# EAGLE board ManualBot (EAGLE 8.0.1)
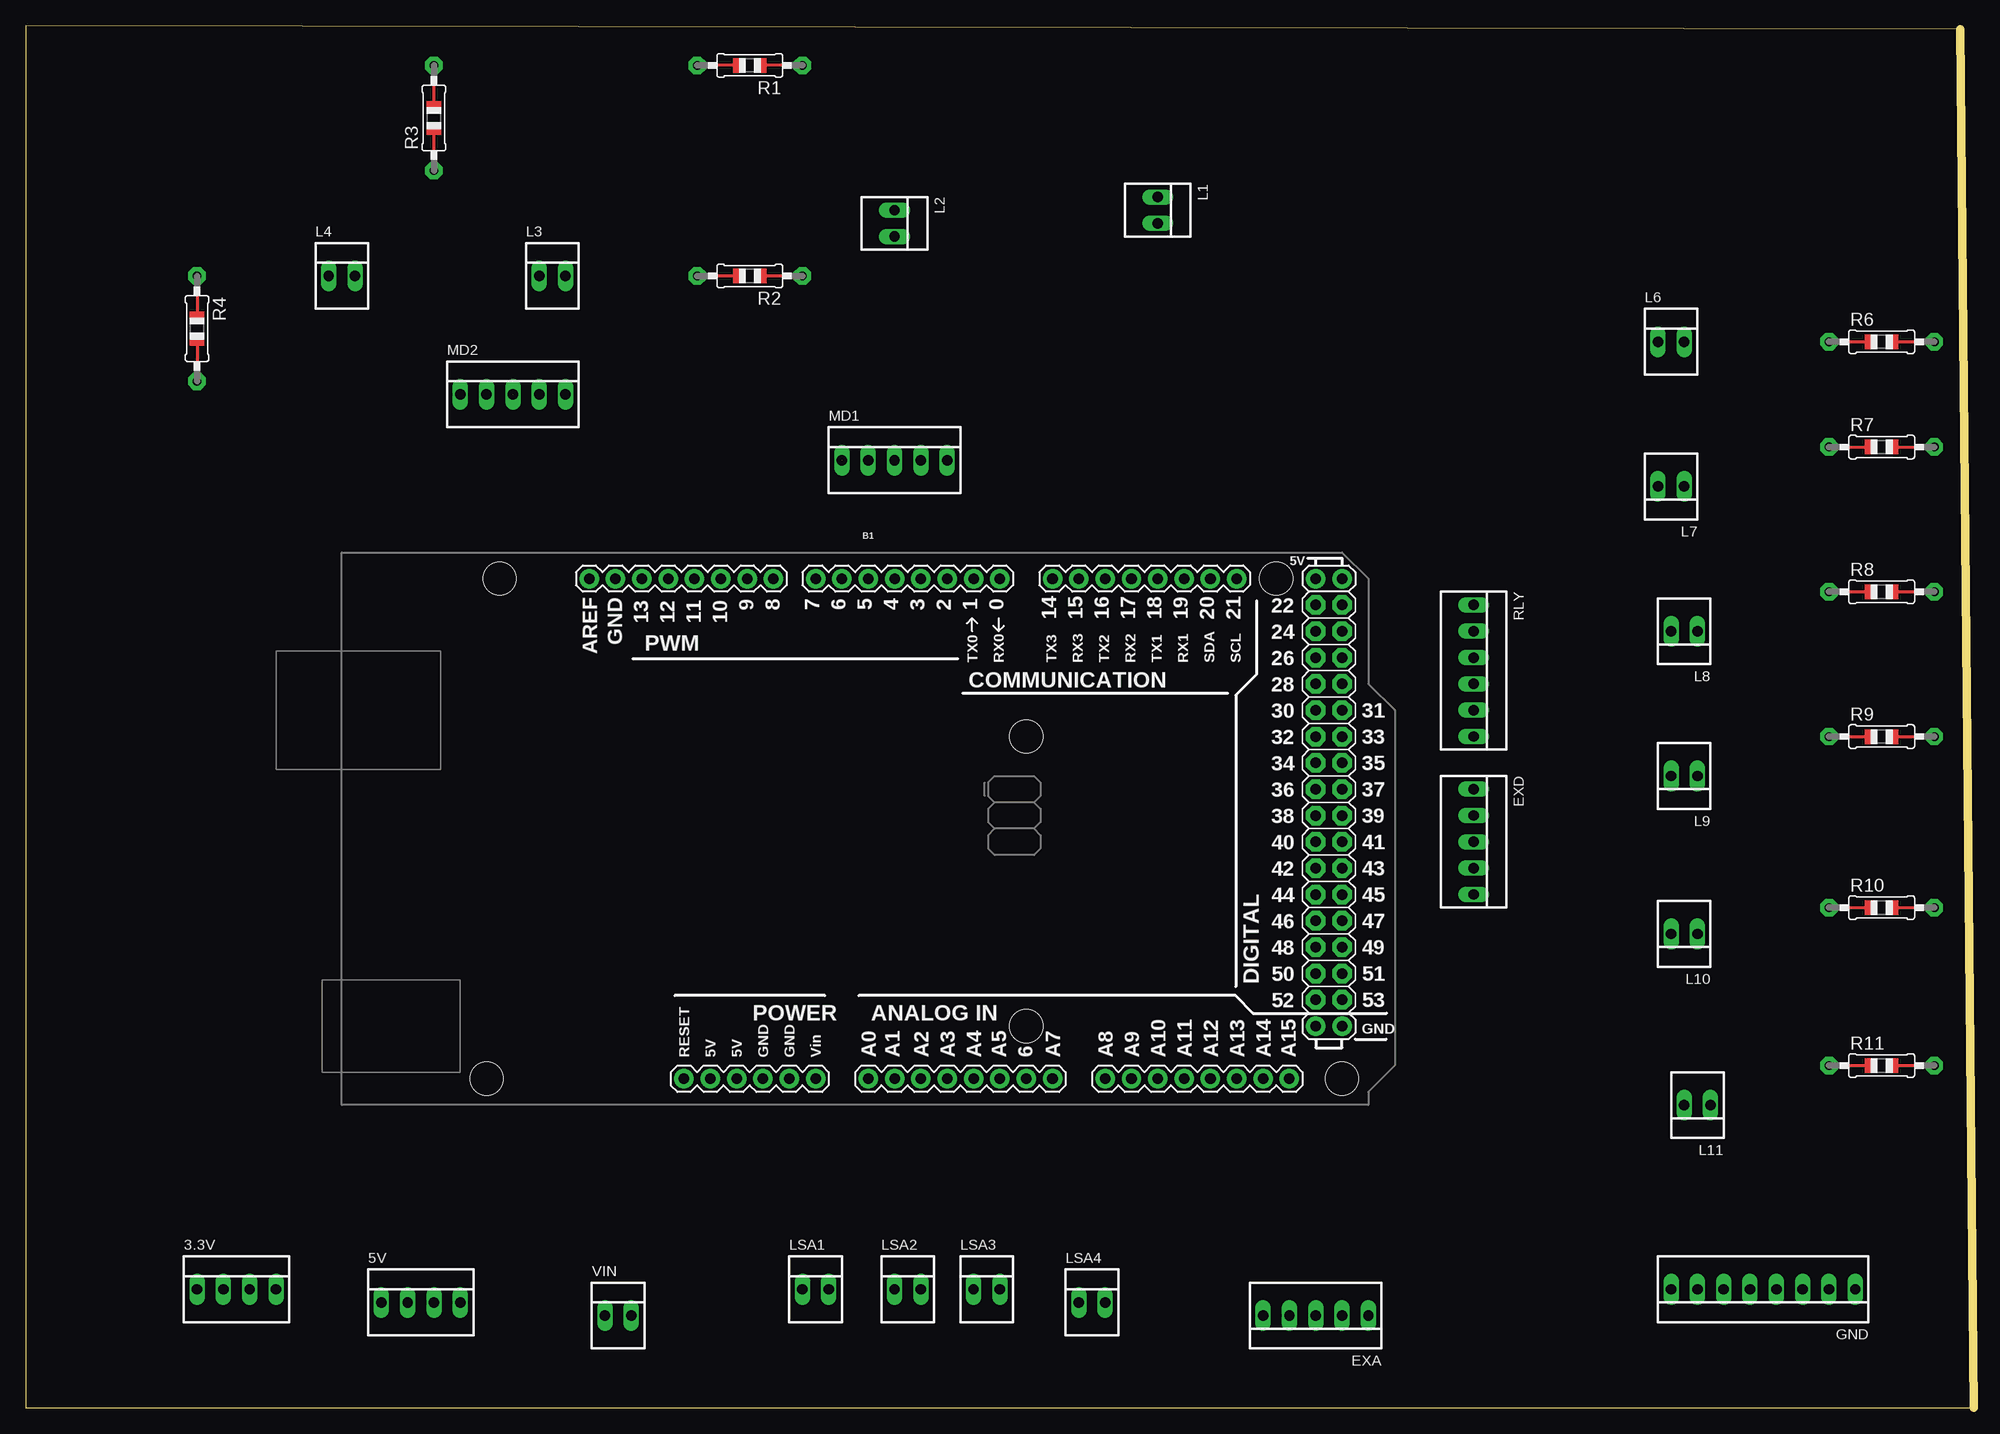
[diagram p0: board, top side]
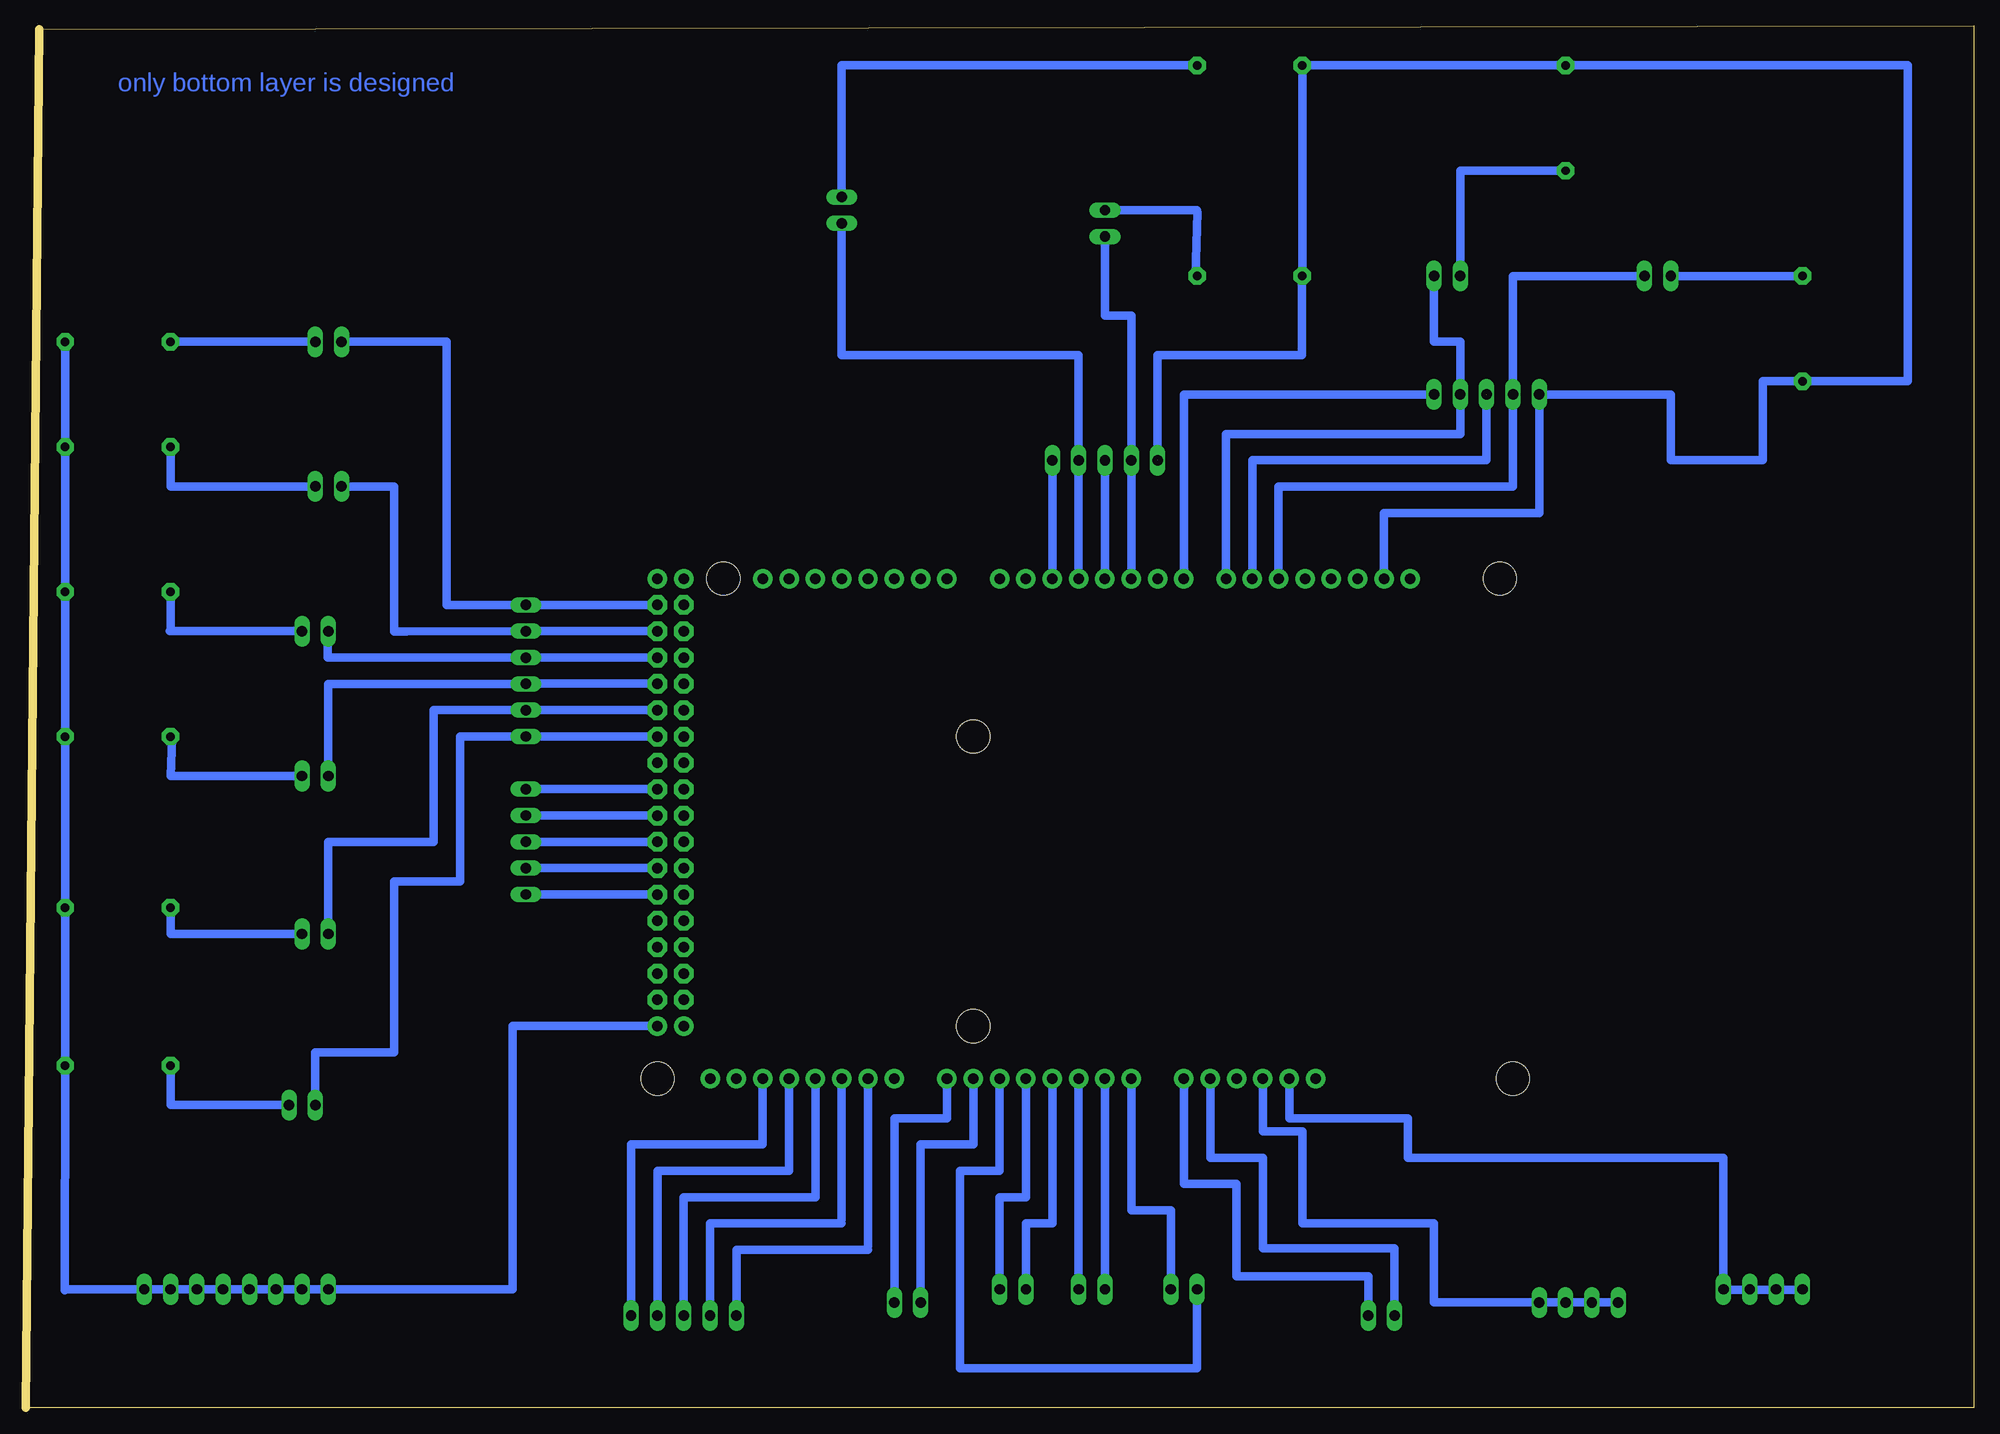
[diagram p1: board, bottom side, seen from below]

Size 187.94 x 133.35 mm. Coordinates in mm from the lower left corner, seen from the top.
Outline: 0,0 187.94,0 186.67,133.02 0,133.35 0,0
Copper layers (1*16): Top 0.035mm / dielectric 1.5mm / Bottom 0.035mm
Design rules "default": minimum track width 10mil, minimum drill 24mil, track to track 8mil, track to pad 8mil, pad to pad 8mil, via to via 8mil, smd to smd 8mil, copper to edge 40mil, drill to drill 8mil, minimum pad ring 10mil, minimum via ring 8mil, stop-mask expansion 4mil, vias tented up to drill 0mil, thermal gap 10mil

## Footprints (pad centres in the part's own frame; a part is rotated, then mirrored left to right if it is on the bottom)
22-23-2041 = drill 1 long: 1 -3.81,0; 2 -1.27,0; 3 1.27,0; 4 3.81,0
ARDUINO_MEGA = drill 1.016 pad 1.88: 0 13.97,24.13; 1 11.43,24.13; 2 8.89,24.13; 3 6.35,24.13; 3.3V -13.97,-24.13; 4 3.81,24.13; 5 1.27,24.13; 5V@0 -11.43,-24.13; 5V@1 44.45,24.13; 5V@2 46.99,24.13; 6 -1.27,24.13; 7 -3.81,24.13; 8 -7.874,24.13; 9 -10.414,24.13; 10 -12.954,24.13; 11 -15.494,24.13; 12 -18.034,24.13; 13 -20.574,24.13; 14 19.05,24.13; 15 21.59,24.13; 16 24.13,24.13; 17 26.67,24.13; 18 29.21,24.13; 19 31.75,24.13; 20 34.29,24.13; 21 36.83,24.13; A0 1.27,-24.13; A1 3.81,-24.13; A2 6.35,-24.13; A3 8.89,-24.13; A4 11.43,-24.13; A5 13.97,-24.13; A6 16.51,-24.13; A7 19.05,-24.13; A8 24.13,-24.13; A9 26.67,-24.13; A10 29.21,-24.13; A11 31.75,-24.13; A12 34.29,-24.13; A13 36.83,-24.13; A14 39.37,-24.13; A15 41.91,-24.13; AREF -25.654,24.13; GND@0 -8.89,-24.13; GND@1 -6.35,-24.13; GND@2 44.45,-19.05; GND@3 46.99,-19.05; GND@4 -23.114,24.13; RESET -16.51,-24.13; VIN -3.81,-24.13 | drill 1.016 pad 1.88 octagon: 22 44.45,21.59; 23 46.99,21.59; 24 44.45,19.05; 25 46.99,19.05; 26 44.45,16.51; 27 46.99,16.51; 28 44.45,13.97; 29 46.99,13.97; 30 44.45,11.43; 31 46.99,11.43; 32 44.45,8.89; 33 46.99,8.89; 34 44.45,6.35; 35 46.99,6.35; 36 44.45,3.81; 37 46.99,3.81; 38 44.45,1.27; 39 46.99,1.27; 40 44.45,-1.27; 41 46.99,-1.27; 42 44.45,-3.81; 43 46.99,-3.81; 44 44.45,-6.35; 45 46.99,-6.35; 46 44.45,-8.89; 47 46.99,-8.89; 48 44.45,-11.43; 49 46.99,-11.43; 50 44.45,-13.97; 51 46.99,-13.97; 52 44.45,-16.51; 53 46.99,-16.51 | hole 3.2: -34.29,24.13; -35.56,-24.13; 16.51,8.89; 16.51,-19.05; 40.64,24.13; 46.99,-24.13
22-23-2051 = drill 1 long: 1 -5.08,0; 2 -2.54,0; 3 0,0; 4 2.54,0; 5 5.08,0
22-23-2081 = drill 1 long: 1 -8.89,0; 2 -6.35,0; 3 -3.81,0; 4 -1.27,0; 5 1.27,0; 6 3.81,0; 7 6.35,0; 8 8.89,0
22-23-2021 = drill 1 long: 1 -1.27,0; 2 1.27,0
0805-THM = drill 0.813 pad 1.676 octagon: 1 -5.08,0; 2 5.08,0
22-23-2061 = drill 1 long: 1 -6.35,0; 2 -3.81,0; 3 -1.27,0; 4 1.27,0; 5 3.81,0; 6 6.35,0

## Placement (x,y rotation side)
3.3V  22-23-2041  [22-23-2041]  20.32,11.43 0 top
5V  22-23-2041  [22-23-2041]  38.1,10.16 0 top
B1  ARDUINO_MEGA_R3FULL  [ARDUINO_MEGA]  80.01,55.88 0 top
EXA  22-23-2051  [22-23-2051]  124.46,8.89 180 top
EXD  22-23-2051  [22-23-2051]  139.7,54.61 270 top
GND  22-23-2081  [22-23-2081]  167.64,11.43 180 top
L1  22-23-2021  [22-23-2021]  109.22,115.57 270 top
L2  22-23-2021  [22-23-2021]  83.82,114.3 270 top
L3  22-23-2021  [22-23-2021]  50.8,109.22 0 top
L4  22-23-2021  [22-23-2021]  30.48,109.22 0 top
L6  22-23-2021  [22-23-2021]  158.75,102.87 0 top
L7  22-23-2021  [22-23-2021]  158.75,88.9 180 top
L8  22-23-2021  [22-23-2021]  160.02,74.93 180 top
L9  22-23-2021  [22-23-2021]  160.02,60.96 180 top
L10  22-23-2021  [22-23-2021]  160.02,45.72 180 top
L11  22-23-2021  [22-23-2021]  161.29,29.21 180 top
LSA1  22-23-2021  [22-23-2021]  76.2,11.43 0 top
LSA2  22-23-2021  [22-23-2021]  85.09,11.43 0 top
LSA3  22-23-2021  [22-23-2021]  92.71,11.43 0 top
LSA4  22-23-2021  [22-23-2021]  102.87,10.16 0 top
MD1  22-23-2051  [22-23-2051]  83.82,91.44 0 top
MD2  22-23-2051  [22-23-2051]  46.99,97.79 0 top
R1  [0805-THM]  69.85,129.54 180 top
R2  [0805-THM]  69.85,109.22 180 top
R3  [0805-THM]  39.37,124.46 90 top
R4  [0805-THM]  16.51,104.14 270 top
R6  [0805-THM]  179.07,102.87 0 top
R7  [0805-THM]  179.07,92.71 0 top
R8  [0805-THM]  179.07,78.74 0 top
R9  [0805-THM]  179.07,64.77 0 top
R10  [0805-THM]  179.07,48.26 0 top
R11  [0805-THM]  179.07,33.02 0 top
RLY  [22-23-2061]  139.7,71.12 270 top
VIN  22-23-2021  [22-23-2021]  57.15,8.89 0 top

## Library data of the parts
3.3V 5V = con-molex; MF: MOLEX; MPN: 22-23-2041; OC_FARNELL: 1462920; OC_NEWARK: 38C0355
B1 = SparkFun-Boards
EXA EXD MD1 MD2 = con-molex; MF: MOLEX; MPN: 22-23-2051; OC_FARNELL: 1462952; OC_NEWARK: 38C9178
GND = con-molex; MF: MOLEX; MPN: 22-23-2081; OC_FARNELL: 1756826; OC_NEWARK: 01C7592
L1-L4 L6-L11 LSA1-LSA4 VIN = con-molex; MF: MOLEX; MPN: 22-23-2021; OC_FARNELL: 1462926; OC_NEWARK: 25C3832
R1-R4 R6-R11 = adafruit
RLY = con-molex; MF: MOLEX; MPN: 22-23-2061; OC_FARNELL: 1462922; OC_NEWARK: 27C1933

## Nets
B$1: R8.2 R9.2 R10.2 R11.2
N$5: 5V.4
N$6: MD2.5
N$7: MD2.4
N$8: B1.9
N$14: LSA2.2
N$15: B1.A7 LSA4.2
N$16: VIN.1
N$18: B1.27 L8.2 RLY.3
N$24: R2.1
N$26: L3.1
N$27: R4.1
N$29: R6.1
N$31: L8.1
N$33: L9.1 R9.1
N$34: R10.1
N$35: L11.1 R11.1
N$39: B1.A13
N$40: B1.25 L7.2 RLY.2
N$41: B1.29 RLY.4
N$42: L10.2
N$43: RLY.6
N$46: R4.2
N$49: B1.37
N$51: B1.41
N$52: EXD.4
S$2: B1.GND@4
S$4: B1.8
S$5: MD2.3
S$7: R6.2
S$8: L11.2
S$9: B1.A1 LSA2.1
S$10: B1.5V@0
S$11: B1.3.3V
S$12: B1.A6 LSA4.1
S$13: B1.A3 LSA3.1
S$14: B1.A5 LSA1.1
S$15: R8.1
S$16: B1.A10
S$17: LSA3.2
S$18: B1.39
S$19: B1.43
S$20: B1.45 EXD.5
S$21: B1.GND@3
S$22: B1.23 RLY.1
S$23: L4.1
S$24: L10.1
S$25: B1.10
S$26: L2.2
S$27: L2.1
S$28: B1.4
S$29: B1.5
S$30: B1.3
S$31: B1.2
S$32: MD1.1
S$33: B1.7
S$34: L3.2
S$35: B1.VIN
S$36: B1.GND@1
S$37: L9.2
S$38: RLY.5
S$39: B1.31
S$40: B1.33
S$41: GND.1
S$42: GND.8
S$43: GND.7
S$44: GND.6
S$45: GND.5
S$46: GND.3
S$47: GND.2
S$48: GND.4
S$49: L1.1 R1.1
S$50: R7.1
S$51: R7.2
S$52: L7.1
S$53: R3.1
S$54: L4.2
S$56: LSA1.2
S$57: B1.A2
S$58: B1.A4
S$59: B1.A11
S$60: B1.A12
S$61: EXA.2
S$62: 3.3V.1 3.3V.2 3.3V.3 3.3V.4
S$63: VIN.2
S$64: EXA.5
S$65: EXA.4
S$66: EXA.1
S$67: MD2.2
S$68: 5V.1
S$69: 5V.2
S$70: 5V.3
S$71: L1.2

## Tracks (layer width: path | path; a pad name or v marks a point on that pad's centre or on a via)
B$1
  Bottom 0.254: 184.12,33.1 R11.2 184.12,32.87 | 184.12,48.18 R10.2 184.12,48.41 | 184.12,64.64 R9.2 184.12,64.87 | 184.12,78.77 R8.2 184.12,83.62
  Bottom 0.813: 184.12,48.18 184.12,33.1 | 184.12,48.41 184.12,64.64 | 184.12,83.62 184.12,78.77 184.12,64.87 | 184.12,32.87 184.2,11.35
N$4
  Bottom 0.813: 106.68,15.57 106.68,31.75
N$5
  Bottom 0.254: 41.71,10.24 5V.4 41.94,10.24
  Bottom 0.813: 34.29,10.16 5V.4 52.07,10.16 52.07,17.78
N$6
  Bottom 0.813: MD2.5 76.2,97.79
N$7
  Bottom 0.254: 49.71,97.1 49.71,97.79 MD2.4
  Bottom 0.813: MD2.4 49.53,102.87 52.07,102.87 52.07,109.22
N$8
  Bottom 0.254: 69.6,80.19 B1.9
  Bottom 0.813: B1.9 69.6,91.44 46.99,91.44 46.99,97.79
N$14
  Bottom 0.254: 86.41,11.61 LSA2.2
N$15
  Bottom 0.813: 99.06,29.21 B1.A7 99.06,27.94 104.14,27.94 LSA4.2
N$16
  Bottom 0.813: VIN.1 55.88,15.39 68.58,15.39 68.58,24.13 73.66,24.13
N$18
  Bottom 0.254: 139.55,72.41 RLY.3 139.78,72.41 | 127.2,72.41 B1.27
  Bottom 0.813: 127.2,72.41 139.55,72.41 | L8.2 158.8,72.39 139.78,72.41
N$20
  Bottom 0.813: 109.22,18.11 109.22,31.75
N$24
  Bottom 0.254: 75.08,109.22 R2.1
  Bottom 0.813: 75.08,109.22 74.91,115.39
N$25
  Bottom 0.813: 76.2,21.59 71.12,21.59
N$26
  Bottom 0.254: 49.48,110.59 L3.1
  Bottom 0.813: L3.1 49.53,119.38 39.37,119.38
N$27
  Bottom 0.254: 16.56,109.22 R4.1
N$29
  Bottom 0.254: 174.09,102.74 R6.1
  Bottom 0.813: R6.1 160.02,102.87
N$31
  Bottom 0.813: 174.04,74.93 L8.1
N$33
  Bottom 0.254: 161.49,60.98 L9.1 | 173.84,64.64 R9.1
  Bottom 0.813: 161.49,60.98 173.99,60.98 173.84,64.64
N$34
  Bottom 0.254: 173.84,48.18 R10.1
N$35
  Bottom 0.813: L11.1 173.99,29.21 R11.1
N$37
  Bottom 0.813: 114.3,31.73 114.3,22.86 127,22.86
N$39
  Bottom 0.254: 116.92,31.73 B1.A13
  Bottom 0.813: 116.92,31.73 116.84,31.73 116.84,25.4
N$40
  Bottom 0.254: 157.38,88.88 L7.2 | 139.78,74.93 RLY.2
  Bottom 0.813: B1.25 RLY.2 | 157.38,88.88 152.4,88.9 152.4,74.91 151.18,74.91 139.78,74.93
N$41
  Bottom 0.254: 139.55,69.9 RLY.4 139.78,69.67 | 127.2,69.9 B1.29
  Bottom 0.813: 127.2,69.9 139.55,69.9 | RLY.4 158.75,69.85 158.75,60.96
N$42
  Bottom 0.813: 148.59,67.16 148.59,54.61 158.75,54.61 L10.2
N$43
  Bottom 0.254: 139.55,64.87 RLY.6 139.78,64.64
  Bottom 0.813: RLY.6 146.05,64.77 146.05,50.8 152.4,50.8 152.4,34.29 160.02,34.29 160.02,29.21
N$46
  Bottom 0.254: 16.56,98.93 R4.2
  Bottom 0.813: 39.37,129.54 6.35,129.54 6.35,99.06 R4.2 20.32,99.06 20.32,91.44 29.21,91.44 29.21,97.79 41.91,97.79
N$49
  Bottom 0.254: 127.2,59.61 B1.37
  Bottom 0.813: B1.37 139.7,59.69
N$51
  Bottom 0.254: 127.2,54.59 B1.41
  Bottom 0.813: B1.41 139.7,54.61
N$52
  Bottom 0.254: 139.9,52.07 EXD.4
S$1
  Bottom 0.406: 64.55,129.32 64.77,129.54
  Bottom 0.813: 64.77,109.22 64.77,129.54 39.37,129.54
S$2
  Bottom 0.254: 56.79,80.19 B1.GND@4
  Bottom 0.813: B1.GND@4 56.9,86.36 41.91,86.36 41.91,97.79
S$3
  Bottom 0.813: 64.8,109.22 64.8,101.6 78.74,101.6
S$4
  Bottom 0.254: 71.42,80.19 72.11,80.19 B1.8
  Bottom 0.813: B1.8 72.14,93.98 49.53,93.98 49.53,97.79
S$5  (1 unrouted)
  Bottom 0.254: 47.19,97.79 MD2.3
S$6
  Bottom 0.813: 109.22,101.6 86.36,101.6 86.36,91.44
S$7
  Bottom 0.813: R6.2 184.15,102.97
S$8
  Bottom 0.254: 159.89,29.21 L11.2
S$9
  Bottom 0.813: B1.A1 LSA2.1
S$10
  Bottom 0.254: 68.45,31.73 B1.5V@0
  Bottom 0.813: B1.5V@0 68.58,26.67 64.77,26.67 64.77,17.78 52.07,17.78
S$11
  Bottom 0.254: 65.94,31.73 B1.3.3V
  Bottom 0.813: B1.3.3V 66.04,27.94 54.61,27.94 54.61,24.13
S$12
  Bottom 0.813: B1.A6 96.52,25.4 101.6,25.4 LSA4.1
S$13
  Bottom 0.813: B1.A3 88.9,17.78 91.44,17.78 LSA3.1
S$14
  Bottom 0.813: B1.A5 93.98,22.86 97.79,22.86 97.79,3.81 74.93,3.81 LSA1.1
S$15
  Bottom 0.254: 173.84,78.54 R8.1
  Bottom 0.813: R8.1 173.99,74.93
S$16
  Bottom 0.254: 109.37,31.73 B1.A10
S$17
  Bottom 0.254: 93.8,11.61 LSA3.2
  Bottom 0.813: LSA3.2 93.98,20.32
S$18
  Bottom 0.254: 127.2,57.1 B1.39
  Bottom 0.813: B1.39 139.7,57.15
S$19
  Bottom 0.254: 127.2,52.07 B1.43
  Bottom 0.813: B1.43 139.7,52.07
S$20
  Bottom 0.813: B1.45 EXD.5
S$21
  Bottom 0.254: 127.2,36.75 B1.GND@3
  Bottom 0.813: B1.GND@3 140.97,36.83 140.97,11.43 158.75,11.43
S$22
  Bottom 0.254: 139.78,77.67 RLY.1 139.55,77.44 | 127.2,77.44 B1.23
  Bottom 0.813: 127.2,77.44 139.55,77.44 | RLY.1 147.32,77.47 147.32,102.87 157.48,102.87
S$23
  Bottom 0.254: 29.13,110.31 L4.1
  Bottom 0.813: L4.1 16.51,109.22
S$24
  Bottom 0.254: 161.49,45.9 L10.1
  Bottom 0.813: L10.1 173.99,45.72 173.99,48.26
S$25
  Bottom 0.254: 67.77,79.96 67.08,79.96 B1.10
  Bottom 0.813: B1.10 67.06,88.9 44.45,88.9
S$26
  Bottom 0.254: 83.62,112.88 L2.2
  Bottom 0.813: L2.2 83.82,105.41 81.28,105.41 81.28,91.44
S$27
  Bottom 0.254: 83.62,115.39 L2.1
  Bottom 0.813: L2.1 74.93,115.57
S$28
  Bottom 0.254: 83.77,80.19 B1.4
  Bottom 0.813: B1.4 83.82,91.44
S$29
  Bottom 0.254: 81.25,80.19 B1.5
  Bottom 0.813: B1.5 81.28,91.44
S$30
  Bottom 0.254: 86.28,80.19 B1.3
  Bottom 0.813: B1.3 86.36,91.44
S$31
  Bottom 0.254: 88.8,80.19 B1.2
  Bottom 0.813: B1.2 88.9,91.44
S$32  (1 unrouted)
  Bottom 0.813: MD1.1 78.74,101.6
S$33
  Bottom 0.254: 76,80.19 B1.7
  Bottom 0.813: 74.93,97.79 76.2,97.79 B1.7
S$34
  Bottom 0.254: 51.99,109.09 L3.2
S$35
  Bottom 0.254: 76,31.73 B1.VIN
  Bottom 0.813: B1.VIN 76.2,21.59
S$36
  Bottom 0.254: 73.48,31.73 B1.GND@1
  Bottom 0.813: B1.GND@1 73.66,24.13
S$37
  Bottom 0.254: 158.75,60.98 L9.2
S$38
  Bottom 0.254: 139.78,67.16 RLY.5 139.55,67.39
  Bottom 0.813: RLY.5 148.59,67.31
S$39
  Bottom 0.254: 127.2,67.39 B1.31
  Bottom 0.813: B1.31 139.7,67.31
S$40
  Bottom 0.254: 127.2,64.87 B1.33
  Bottom 0.813: B1.33 139.7,64.77
S$41
  Bottom 0.254: 176.58,11.61 GND.1 176.35,11.38
  Bottom 0.813: GND.1 184.15,11.43
S$42
  Bottom 0.254: 158.75,11.61 GND.8 158.75,11.38
  Bottom 0.813: GND.8 176.53,11.43
S$43
  Bottom 0.254: 161.27,11.38 GND.7
S$44
  Bottom 0.254: 164.01,11.38 GND.6
S$45
  Bottom 0.254: 166.52,11.38 GND.5 166.29,11.38
S$46
  Bottom 0.254: 171.55,11.38 GND.3 171.32,11.38
S$47
  Bottom 0.813: 174.07,11.38 GND.2
S$48
  Bottom 0.254: 169.04,11.38 GND.4 168.81,11.38
S$49
  Bottom 0.813: R1.1 109.22,129.54 L1.1
S$50
  Bottom 0.254: 173.97,92.79 R7.1
  Bottom 0.813: R7.1 173.99,88.9
S$51
  Bottom 0.254: 184.02,92.79 R7.2 184.25,92.56
  Bottom 0.813: 184.15,83.82 R7.2 184.15,102.87
S$52
  Bottom 0.254: 160.12,89.1 L7.1
  Bottom 0.813: L7.1 173.99,88.9
S$53
  Bottom 0.254: 39.42,119.28 R3.1
S$54
  Bottom 0.254: 31.88,109.04 L4.2
  Bottom 0.813: L4.2 44.45,109.22 44.45,97.79
S$55
  Bottom 0.254: 41.83,98.93 41.71,99.06
S$56
  Bottom 0.254: 77.65,11.61 LSA1.2
  Bottom 0.813: LSA1.2 77.47,19.05 81.28,19.05 81.28,31.75
S$57
  Bottom 0.254: 86.28,31.73 B1.A2
  Bottom 0.813: B1.A2 86.36,11.43
S$58
  Bottom 0.254: 91.54,31.73 B1.A4
  Bottom 0.813: B1.A4 91.44,20.32 93.98,20.32
S$59
  Bottom 0.254: 111.89,31.73 B1.A11
  Bottom 0.813: B1.A11 111.76,20.32 124.46,20.32 124.46,8.89
S$60
  Bottom 0.254: 114.4,31.73 B1.A12
S$61
  Bottom 0.254: 126.98,9.09 EXA.2
  Bottom 0.813: EXA.2 127,22.86
S$62
  Bottom 0.254: 24.11,11.38 3.3V.4 | 21.59,11.38 3.3V.3 | 19.07,11.38 3.3V.2 18.85,11.38 | 16.56,11.38 3.3V.1
  Bottom 0.813: 24.11,11.38 21.59,11.38 19.07,11.38 | 18.85,11.38 16.56,11.38 | 3.3V.4 24.13,24.13 54.61,24.13
S$63
  Bottom 0.254: 58.62,11.61 VIN.2
  Bottom 0.813: VIN.2 58.42,12.7 71.12,12.7 71.12,21.59
S$64
  Bottom 0.254: 119.2,9.09 EXA.5
  Bottom 0.813: EXA.5 119.38,15.24 106.68,15.24
S$65
  Bottom 0.254: 121.72,9.09 EXA.4
  Bottom 0.813: EXA.4 121.92,17.78 109.22,17.78
S$66
  Bottom 0.254: 129.49,9.09 EXA.1
  Bottom 0.813: EXA.1 129.54,25.4 116.84,25.4
S$67
  Bottom 0.813: MD2.2 44.45,88.9
S$68
  Bottom 0.254: 34.39,10.24 5V.1
S$69
  Bottom 0.254: 36.91,10.24 5V.2 36.68,10.24
S$70
  Bottom 0.254: 39.42,10.24 5V.3 39.19,10.24
S$71
  Bottom 0.254: 109.14,114.15 L1.2
  Bottom 0.813: L1.2 109.22,101.6

## Text on the board
Bottom: only bottom layer is designed